# Altium PCB 电眼主板.PcbDoc (part 3 of 3)
Units mm, origin at the board's own origin, x right, y up, seen from the top; angles counter-clockwise.
Board outline 180 x 100 mm, 2 copper layers (Top Layer, Bottom Layer); 220 components, 270 nets, 826 pads, 211 vias.
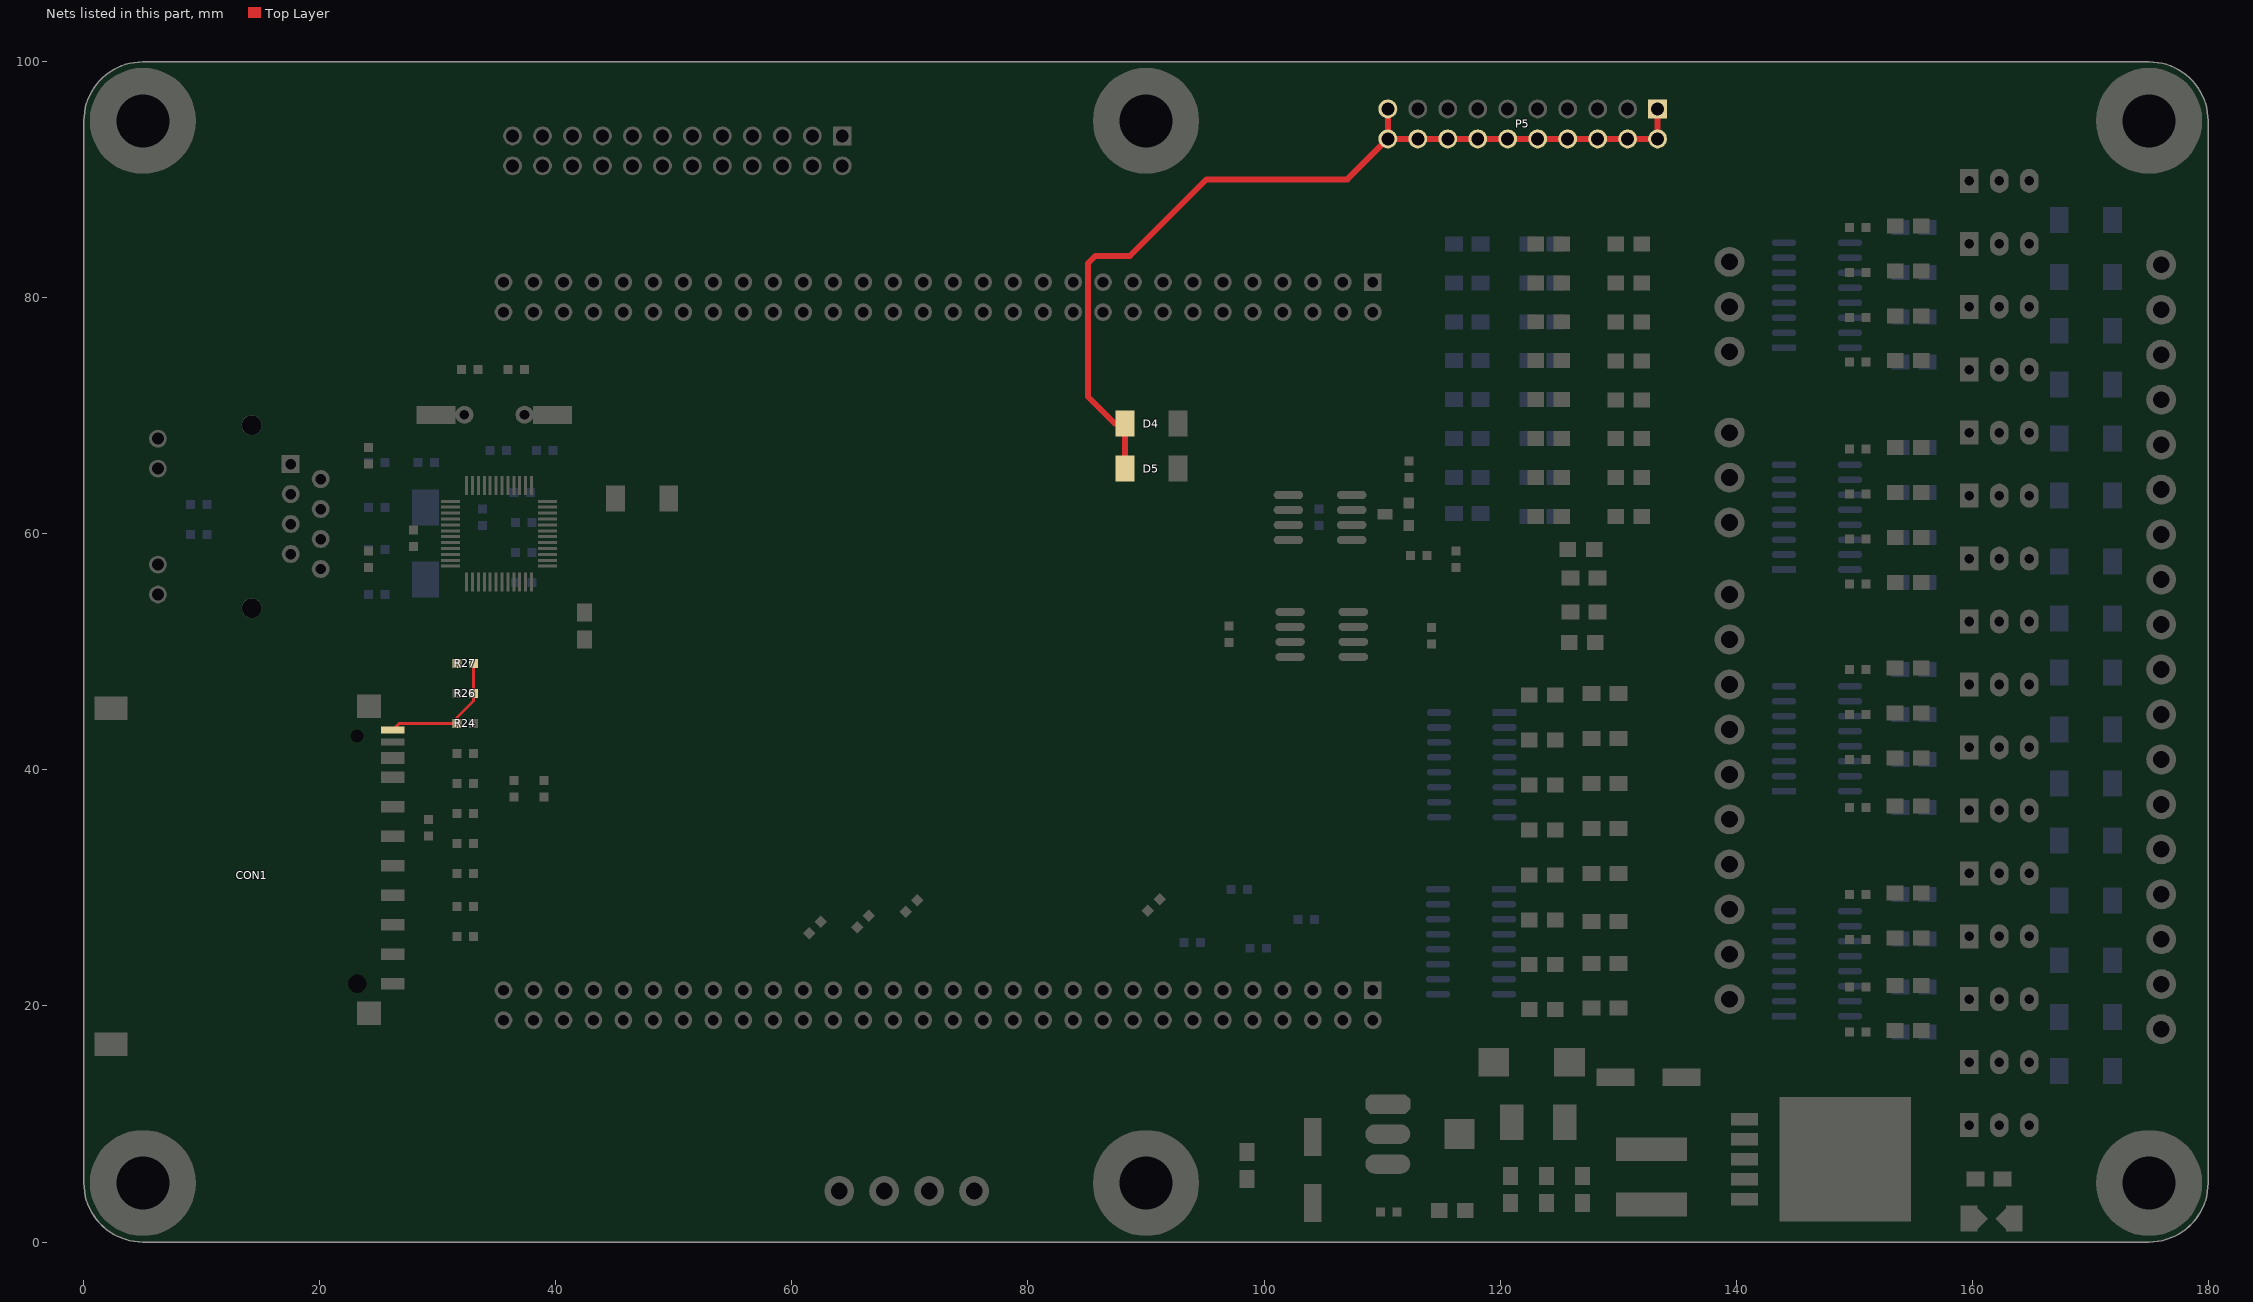
[diagram p3: the nets of this part, all layers, seen from the top]

## Via types
v1: diameter 0.7, hole 0.3, Top Layer to Bottom Layer, 166 vias
v2: diameter 1.4, hole 0.6, Top Layer to Bottom Layer, 39 vias
v3: diameter 0.6, hole 0.3, Top Layer to Bottom Layer, 6 vias

## Nets (pads, with @x,y where several pads share a name; then routed paths per layer and width w, separated by ;. In a path a pad name is that pad's centre, name@x,y a point inside that pad or via, vN(x,y) a via of type N, cw(c..) or ccw(c..) an arc to the next point about the centre after c; other vN are vias at no path point) (continued)
VOUT1: D4.2 D5.2 P5.1 P5.2 P5.4 P5.6 P5.8 P5.10 P5.12 P5.14 P5.16 P5.18 P5.19 P5.20 | length 76.9
  Top Layer w0.508: D5.2@88.21,65.532 D4.2@88.21,69.342 87.375,69.342 85.09,71.627 85.09,82.931 85.725,83.566 88.646,83.566 95.123,90.043 107.061,90.043 P5.20@110.49,93.472 ; P5.19@110.49,96.012 P5.20@110.49,93.472 ; P5.1@133.35,96.012 P5.2@133.35,93.472 P5.4@130.81,93.472 P5.6@128.27,93.472 P5.8@125.73,93.472 P5.10@123.19,93.472 P5.12@120.65,93.472 P5.14@118.11,93.472 P5.16@115.57,93.472 P5.18@113.03,93.472 P5.20@110.49,93.472
WP_SD: R27.2
WP_SD_1: CON1.10 R24.2 R26.1 R27.1 | length 11.4
  Top Layer w0.254: CON1.10@26.162,43.384 26.72,43.942 R24.2@31.623,43.942 31.623,44.45 33.02,45.847 R26.1@33.02,46.482 R27.1@33.02,49.022
pads on no net: CON1.16 CON1.17 J1.7 P4.9 P4.11 P6.14 P6.25 P6.26 P7.1 P7.14 P7.23 P7.41 U1.5 U4.19 U4.46

## Polygon pours and split planes (outlines as drawn)
GND on Top Layer "TopOverlay-No Net" (hatched 90Degree grid 0.508 track 0.254, remove dead copper, pour order 1000): -7.14,104.548 189.71,104.548 189.71,-7.085 189.583,-6.958 -7.14,-6.958
GND on Bottom Layer "TopOverlay-No Net" (hatched 90Degree grid 0.508 track 0.254, remove dead copper, pour order 1001): -7.174,108.359 189.676,108.359 189.676,-3.274 189.549,-3.147 -7.174,-3.147

## Keep-outs
Keep-Out Layer:
  lines w0.254: 0,5 ccw(c5,5) 5,0 175,0 ccw(c175,5) 180,5 180,95 ccw(c175,95) 175,100 5,100 ccw(c5,95) 0,95 0,5
  lines w0.6: 117.484,19.384 117.484,31.322 ; 117.6,34.37 117.6,46.308 ; 146.812,17.526 146.812,29.464 ; 146.812,36.576 146.812,48.514 ; 146.812,55.372 146.812,67.31 ; 146.812,74.168 146.812,86.106

## Silkscreen, mask and mechanical layers (free items; w line width, h text height)
Top Overlay:
  circle w0.254: c114.22,18.796 r1.552
  circle w0.254: c30.56,18.796 r1.552
  circle w0.254: c112.442,81.336 r1.552
  circle w0.254: c30.56,81.336 r1.552
  rectangle: 102.74,16.256 110.49,22.606
  lines w0.254: 25.56,18.796 ccw(c30.56,18.796) 30.56,13.796 ; 25.56,18.796 25.56,81.336 ; 25.56,18.796 25.56,81.336 ; 25.56,81.336 cw(c30.56,81.336) 30.56,86.336 ; 30.56,13.796 114.22,13.796 ; 30.56,13.796 114.22,13.796 ; 30.56,86.336 114.22,86.336 ; 30.56,86.336 114.22,86.336 ; 114.22,13.796 ccw(c114.22,18.796) 119.22,18.796 ; 114.22,86.336 cw(c114.22,81.336) 119.22,81.336 ; 119.22,18.796 119.22,81.336 ; 119.22,18.796 119.22,81.336 ; 34.16,17.526 34.16,22.606 110.49,22.606 110.49,17.526 34.16,17.526 ; 34.16,77.526 34.16,82.606 110.49,82.606 110.49,77.526 34.16,77.526
  text "O15" at 171.831,82.55 h1.52 r90
  text "GND" at 145.288,81.407 h1.52 r90
  text "B" at 145.161,78.613 h1.52 r90
  text "O14" at 170.942,78.232 h1.52 r90
  text "A" at 145.161,74.549 h1.52 r90
  text "O13" at 171.704,74.001 h1.52 r90
  text "O12" at 170.942,69.723 h1.52 r90
  text "GND" at 145.161,68.453 h1.52 r90
  text "O11" at 171.958,66.167 h1.52 r90
  text "C_H" at 145.161,62.865 h1.52 r90
  text "O10" at 170.942,61.976 h1.52 r90
  text "O9" at 171.704,58.761 h1.52 r90
  text "C_L" at 145.161,57.19 h1.52 r90
  text "O8" at 171.704,54.951 h1.52 r90
  text "24-" at 143.637,53.34 h1.52
  text "O7" at 171.704,51.141 h1.52 r90
  text "GND" at 143.51,50.097 h1.52
  text "O6" at 171.704,47.331 h1.52 r90
  text "I0" at 145.161,45.807 h1.52 r90
  text "O5" at 171.704,43.521 h1.52 r90
  text "I1" at 145.034,42.124 h1.52 r90
  text "O4" at 171.704,39.711 h1.52 r90
  text "I2" at 145.034,38.314 h1.52 r90
  text "O3" at 171.704,35.901 h1.52 r90
  text "I3" at 145.034,34.25 h1.52 r90
  text "O2" at 171.704,32.091 h1.52 r90
  text "I4" at 145.034,30.694 h1.52 r90
  text "O1" at 171.704,28.281 h1.52 r90
  text "I5" at 145.034,27.011 h1.52 r90
  text "O0" at 171.704,24.471 h1.52 r90
  text "I6" at 145.034,23.074 h1.52 r90
  text "GND" at 171.831,19.685 h1.52 r90
  text "I7" at 145.034,19.264 h1.52 r90
  text "24+" at 171.886,14.478 h1.52 r90
  text "GND" at 69.215,9.144 h1.52
  text "5V+" at 74.422,9.144 h1.52
  text "TX" at 61.595,9.017 h1.52
  text "RX" at 65.659,9.017 h1.52
  text "Uart2" at 53.594,2.794 h1.52
  text "5V+" at 137.033,1.016 h1
Mechanical 1:
  lines w0.254: 0,5 0,95 ; 5,0 175,0 ; 5,100 175,100 ; 180,5 180,95

## Text inside footprints (layer, text, board x,y; h text height)
P6: Top Overlay "2" at 108.712,75.438 h1.27; Top Overlay "1" at 108.966,83.82 h1.27; Top Overlay "59" at 34.29,83.312 h1.27; Top Overlay "60" at 31.242,77.724 h1.27; Bottom Overlay "1" at 108.966,83.82 h1.27
P7: Top Overlay "2" at 111.252,18.034 h1.27; Top Overlay "1" at 111.252,20.955 h1.27; Top Overlay "59" at 34.544,23.114 h1.27; Top Overlay "60" at 34.29,15.748 h1.27; Bottom Overlay "1" at 108.966,23.114 h1.27
U6: Top Overlay "1" at 114.883,11.836 h1.27 r270